# Altium PCB PCB1.PcbDoc
Units mil, origin at the board's own origin, x right, y up, seen from the top; angles counter-clockwise.
Board outline 1732.28 x 944.88 mil, 2 copper layers (Top Layer, Bottom Layer), stack 61.811 mil thick; 2 components, 16 nets, 34 pads, 0 vias.
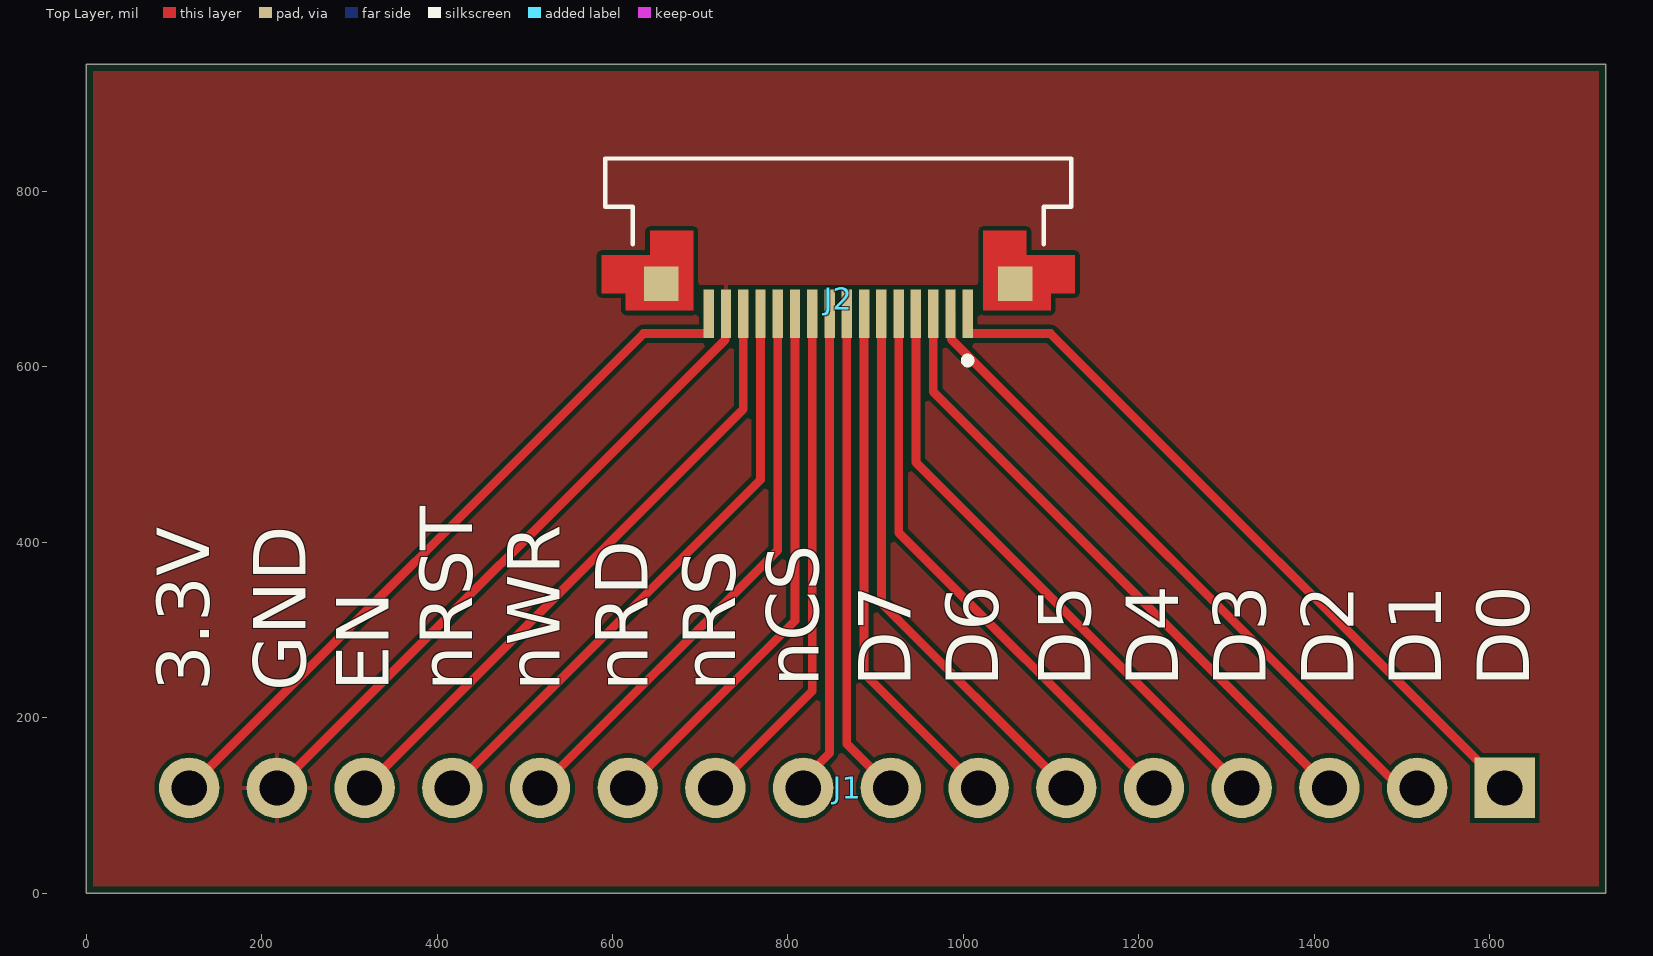
[diagram p0: Top Layer view]
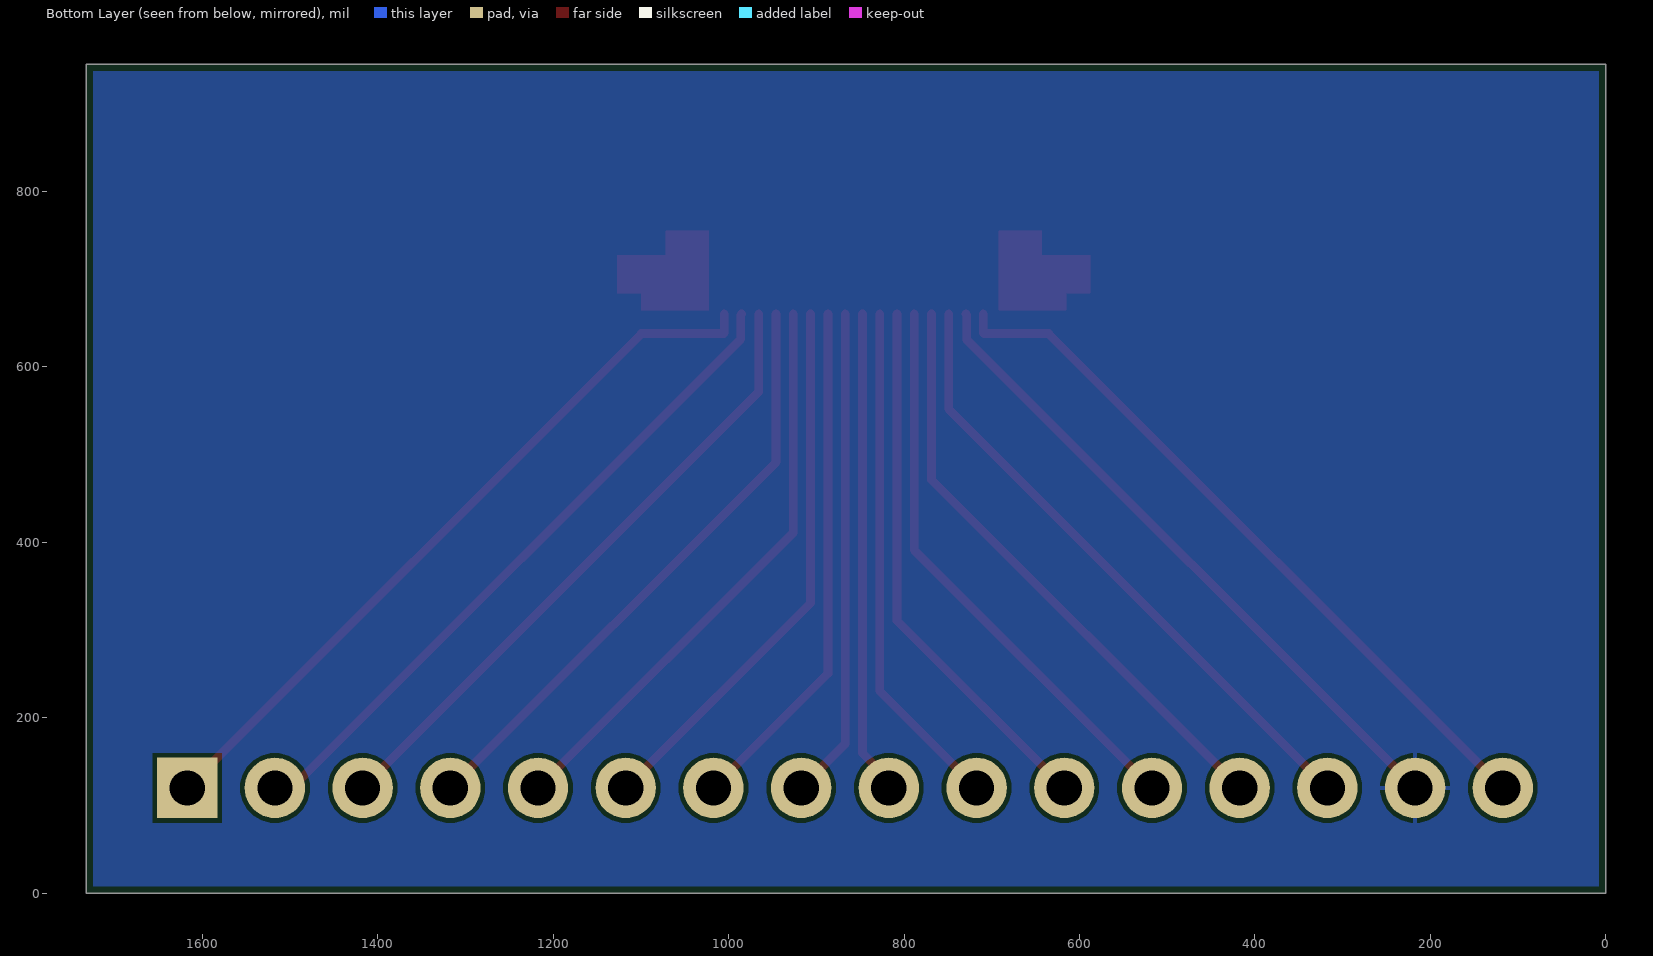
[diagram p1: Bottom Layer view, seen from below]

## Layer stack, top to bottom
Top Solder: solder mask 0.5, Solder Resist, Dk 3.8
Top Layer: signal copper 1.378
Dielectric: core 59.0551, FR-4, Dk 4.5
Bottom Layer: signal copper 1.378
Bottom Solder: solder mask 0.5, Solder Resist, Dk 3.8

## Board outline
0,0 0,944.88 1732.28,944.88 1732.28,0

## Design rules (kind name [scope] priority, off if disabled: settings)
BoardOutlineClearance [All] p1: gap=7.87 ignorepadtopadclearanceinfootprint=FALSE
Clearance [All] p1: gap=5 ignorepadtopadclearanceinfootprint=FALSE except(9.84: Arc-Hole Track-Hole SMDPad-Hole THPad-Hole Via-Hole Fill-Hole Poly-Hole Region-Hole Text-Hole)
ComponentClearance [All] p1: gap=5 collisioncheckmode=3 verticalgap=5 showdistances=TRUE
DiffPairsRouting [All] p1: maxlimit=10 minlimit=5 mostfreqgap=5 toplayer_minwidth=5 toplayer_maxwidth=1000 toplayer_prefwidth=5 bottomlayer_minwidth=5 bottomlayer_maxwidth=1000 bottomlayer_prefwidth=5 maxuncoupledlength=500
Height [All] p1: minheight=0 maxheight=71497.94 prefheight=500
HoleSize [All] p1: absolutevalues=TRUE maxlimit=248.03 minlimit=11.81 maxpercent=80.000 minpercent=20.000
HoleToHoleClearance [All] p1: gap=9.84 allowstackedmicrovias=FALSE
MinimumAnnularRing [All] p1: minimumring=3
MinimumSolderMaskSliver [All] p1: minsoldermaskwidth=0
PlaneClearance [All] p1: clearance=5
PlaneConnect PlaneConnectPowerPads [InPadClass('PowerPads')] p1: planeconnectstyle=Direct reliefexpansion=20 reliefentries=4 reliefconductorwidth=10 reliefairgap=10
PlaneConnect [All] p2: pad.planeconnectstyle=Relief pad.reliefexpansion=11.81 pad.reliefentries=4 pad.reliefconductorwidth=5 pad.reliefairgap=5 via.planeconnectstyle=Direct via.reliefexpansion=11.81 via.reliefentries=4 via.reliefconductorwidth=5 via.reliefairgap=5
PolygonConnect PolygonConnectPowerPads [All vs (InPadClass('PowerPads'))] p1: connectstyle=Direct reliefconductorwidth=10 reliefentries=4 polygonreliefangle="90 Angle" airgapwidth=10
PolygonConnect [All] p2: thpad.connectstyle=Relief thpad.reliefconductorwidth=5 thpad.reliefentries=4 thpad.polygonreliefangle="90 Angle" thpad.airgapwidth=5 smdpad.connectstyle=Relief smdpad.reliefconductorwidth=5 smdpad.reliefentries=4 smdpad.polygonreliefangle="90 Angle" smdpad.airgapwidth=5 via.connectstyle=Direct via.reliefconductorwidth=5 via.reliefentries=4 via.polygonreliefangle="90 Angle" via.airgapwidth=5
RoutingVias [All] p1: holewidth=11.81 width=23.62 viastyle="Through Hole" minholewidth=11.81 minwidth=23.62 maxholewidth=23.62 maxwidth=259.84
SilkToSilkClearance [All] p1: silktosilkclearance=0
SilkToSolderMaskClearance [IsPad] p1: minsilkscreentomaskgap=5 clearancetoexposedcopper=TRUE
SolderMaskExpansion [All] p1: expansion=2.95 istentingtop=FALSE
Width [All] p1: maxlimit=1000 minlimit=5 preferedwidth=5 minimp=50.000000 maximp=50.000000 favimp=50.000000
20 further rules are at their usual default settings.

## Components (designator, comment, footprint, x,y, rotation, side; value= is the part's Value field where it differs from the comment)
J1 "10129378-916001BLF" 16POS 1617.28,119.88 r180 top
J2 "SFV16R-1STBE1HLF" FFC16POS 857.28,754.88 r180 top

## Footprints (in the part's own frame and the unit in brackets; to place one, negate y for a bottom-side part, rotate by r counter-clockwise, add the part's x,y. Pads: shape width x height; smd on the part's side, far side on the other; paste and mask are expansions set on the pad)
16POS [mm] "TH"
  rect 1.75x1.75 hole 1.02: 1(0,0)
  round 1.75 hole 1.02: 2(2.54,0) 3(5.08,0) 4(7.62,0) 5(10.16,0) 6(12.7,0) 7(15.24,0) 8(17.78,0) 9(20.32,0) 10(22.86,0) 11(25.4,0) 12(27.94,0) 13(30.48,0) 14(33.02,0) 15(35.56,0) 16(38.1,0)
  body extent -1.27,-1.2 39.37,1.2, height 8.18
FFC16POS [mm]
  rect 0.3x1.4 smd mask+0.05: 1(-3.75,2.4) 2(-3.25,2.4) 3(-2.75,2.4) 4(-2.25,2.4) 5(-1.75,2.4) 6(-1.25,2.4) 7(-0.75,2.4) 8(-0.25,2.4) 9(0.25,2.4) 10(0.75,2.4) 11(1.25,2.4) 12(1.75,2.4) 13(2.25,2.4) 14(2.75,2.4) 15(3.25,2.4) 16(3.75,2.4)
  rect 1x1 smd paste-1 mask+0: SH1(-5.12,1.53) SH2(5.12,1.53)
  Top Layer region: 6.15,1.8 6.85,1.8 6.85,0.7 5.45,0.7 5.45,0 4.2,0 4.2,2.3 6.15,2.3
  Top Layer region: -4.2,0 -5.45,0 -5.45,0.7 -6.85,0.7 -6.85,1.8 -6.15,1.8 -6.15,2.3 -4.2,2.3
  silkscreen extent -6.75,-2.1 6.75,3.85, body extent -6.75,-2.1 6.75,2.8, height 1.87

## Part data
J1: "Connector Header Through Hole 16 position 0.100\" (2.54mm)"
J2: "16 Position FFC, FPC Connector Contacts, Bottom 0.020\" (0.50mm) Surface Mount, Right Angle"

## Nets (pads, with @x,y where several pads share a name; then routed paths per layer and width w, separated by ;. In a path a pad name is that pad's centre, name@x,y a point inside that pad or via, vN(x,y) a via of type N, cw(c..) or ccw(c..) an arc to the next point about the centre after c; other vN are vias at no path point)
C\S\: J1.9 J2.9 | length 553
  Top Layer w10: J1.9 817.28,129.5 847.44,159.66 J2.9
D0: J1.1 J2.1 | length 848.9
  Top Layer w10: J2.1 1004.92,638.74 1005.83,637.83 1099.33,637.83 J1.1
D1: J1.2 J2.2 | length 772.3
  Top Layer w10: J2.2 986.14,659.49 986.14,631.57 1486.56,131.15 1506.01,131.15 J1.2
D2: J1.3 J2.3 | length 727.6
  Top Layer w10: J2.3 965.55,571.61 J1.3
D3: J1.4 J2.4 | length 694.4
  Top Layer w10: J2.4 945.87,491.3 J1.4
D4: J1.5 J2.5 | length 661.1
  Top Layer w10: J2.5 926.18,410.98 J1.5
D5: J1.6 J2.6 | length 627.8
  Top Layer w10: J2.6 906.5,330.67 J1.6
D6: J1.7 J2.7 | length 594.6
  Top Layer w10: J2.7 886.81,250.35 J1.7
D7: J1.8 J2.8 | length 561.3
  Top Layer w10: J2.8 867.13,170.04 J1.8
LEDEN: J1.14 J2.14 | length 719.3
  Top Layer w10: J1.14 749.02,551.61 J2.14
R\D\: J1.11 J2.11 | length 619.5
  Top Layer w10: J1.11 808.07,310.67 J2.11
R\S\: J1.10 J2.10 | length 586.3
  Top Layer w10: J1.10 827.76,230.35 J2.10
R\S\T\: J1.13 J2.13 | length 686.1
  Top Layer w10: J1.13 768.7,471.3 J2.13
VCC: J1.16 J2.16 | length 828.9
  Top Layer w10: J1.16 635.24,637.83 708.74,637.83 709.65,638.74 J2.16
VSS: J1.15 J2.15 | length 752.6
  Top Layer w10: J1.15 728.43,631.02 728.43,659.49 J2.15
W\R\: J1.12 J2.12 | length 652.8
  Top Layer w10: J1.12 788.39,390.98 J2.12
pads on no net: J2.SH1 J2.SH2

## Polygon pours and split planes (outlines as drawn)
VSS on Bottom Layer "VSS_L02_P000" (solid, pour order 0): 0,945 1735,945 1735,0 0,0
VSS on Top Layer "VSS_L01_P001" (solid, pour order 1): 0,945 1735,945 1735,0 0,0

## Silkscreen, mask and mechanical layers (free items; w line width, h text height)
Top Overlay:
  text "nCS" at 835,235 h60 r90
  text "D7" at 940,235 h60 r90
  text "D6" at 1040,235 h60 r90
  text "D5" at 1145,235 h60 r90
  text "D4" at 1245,235 h60 r90
  text "D3" at 1345,235 h60 r90
  text "D2" at 1445,235 h60 r90
  text "D1" at 1545,235 h60 r90
  text "D0" at 1645,235 h60 r90
  text "3.3V" at 140,230 h60 r90
  text "GND" at 250,230 h60 r90
  text "EN" at 345,230 h60 r90
  text "nRST" at 440,230 h60 r90
  text "nWR" at 540,230 h60 r90
  text "nRD" at 640,230 h60 r90
  text "nRS" at 740,230 h60 r90
Mechanical 1:
  the board outline again, w10